# Altium PCB hdmi addon.PcbDoc
Units mil, origin at the board's own origin, x right, y up, seen from the top; angles counter-clockwise.
Board outline 3395.53 x 2214.53 mil, 2 copper layers (Top Layer, Bottom Layer); 10 components, 18 nets, 59 pads, 9 vias.
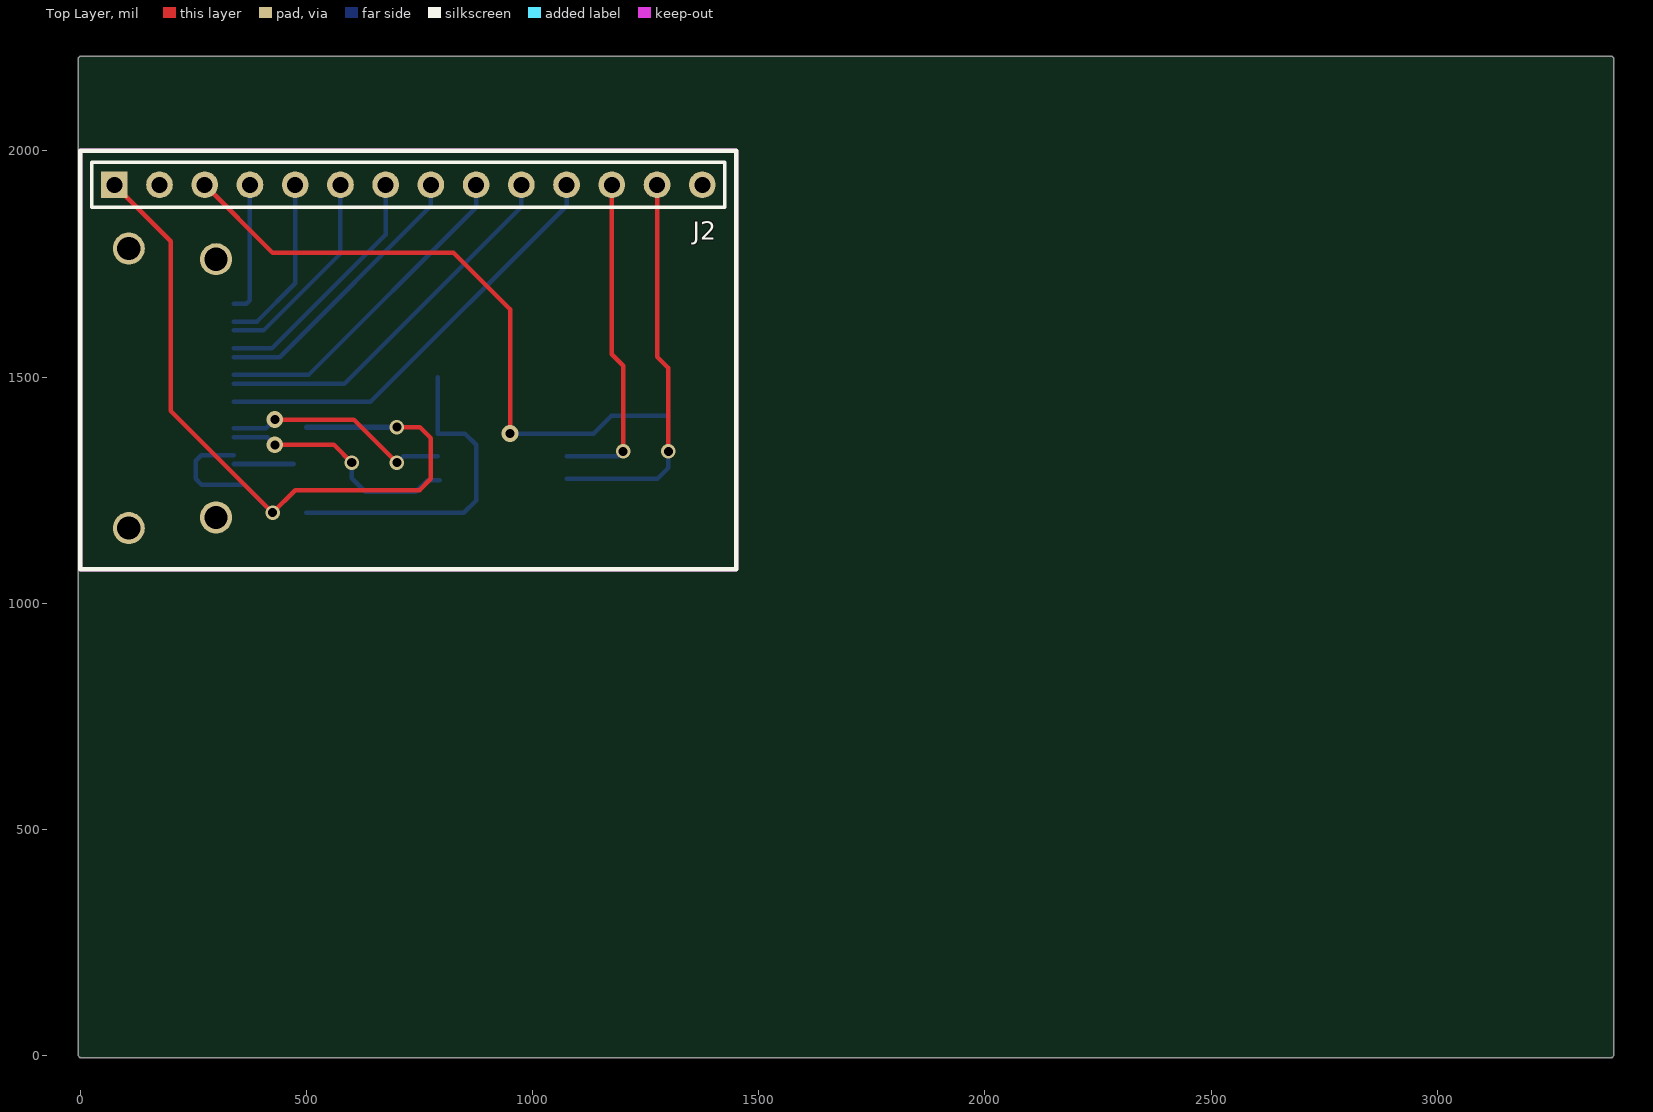
[diagram p0: Top Layer view]
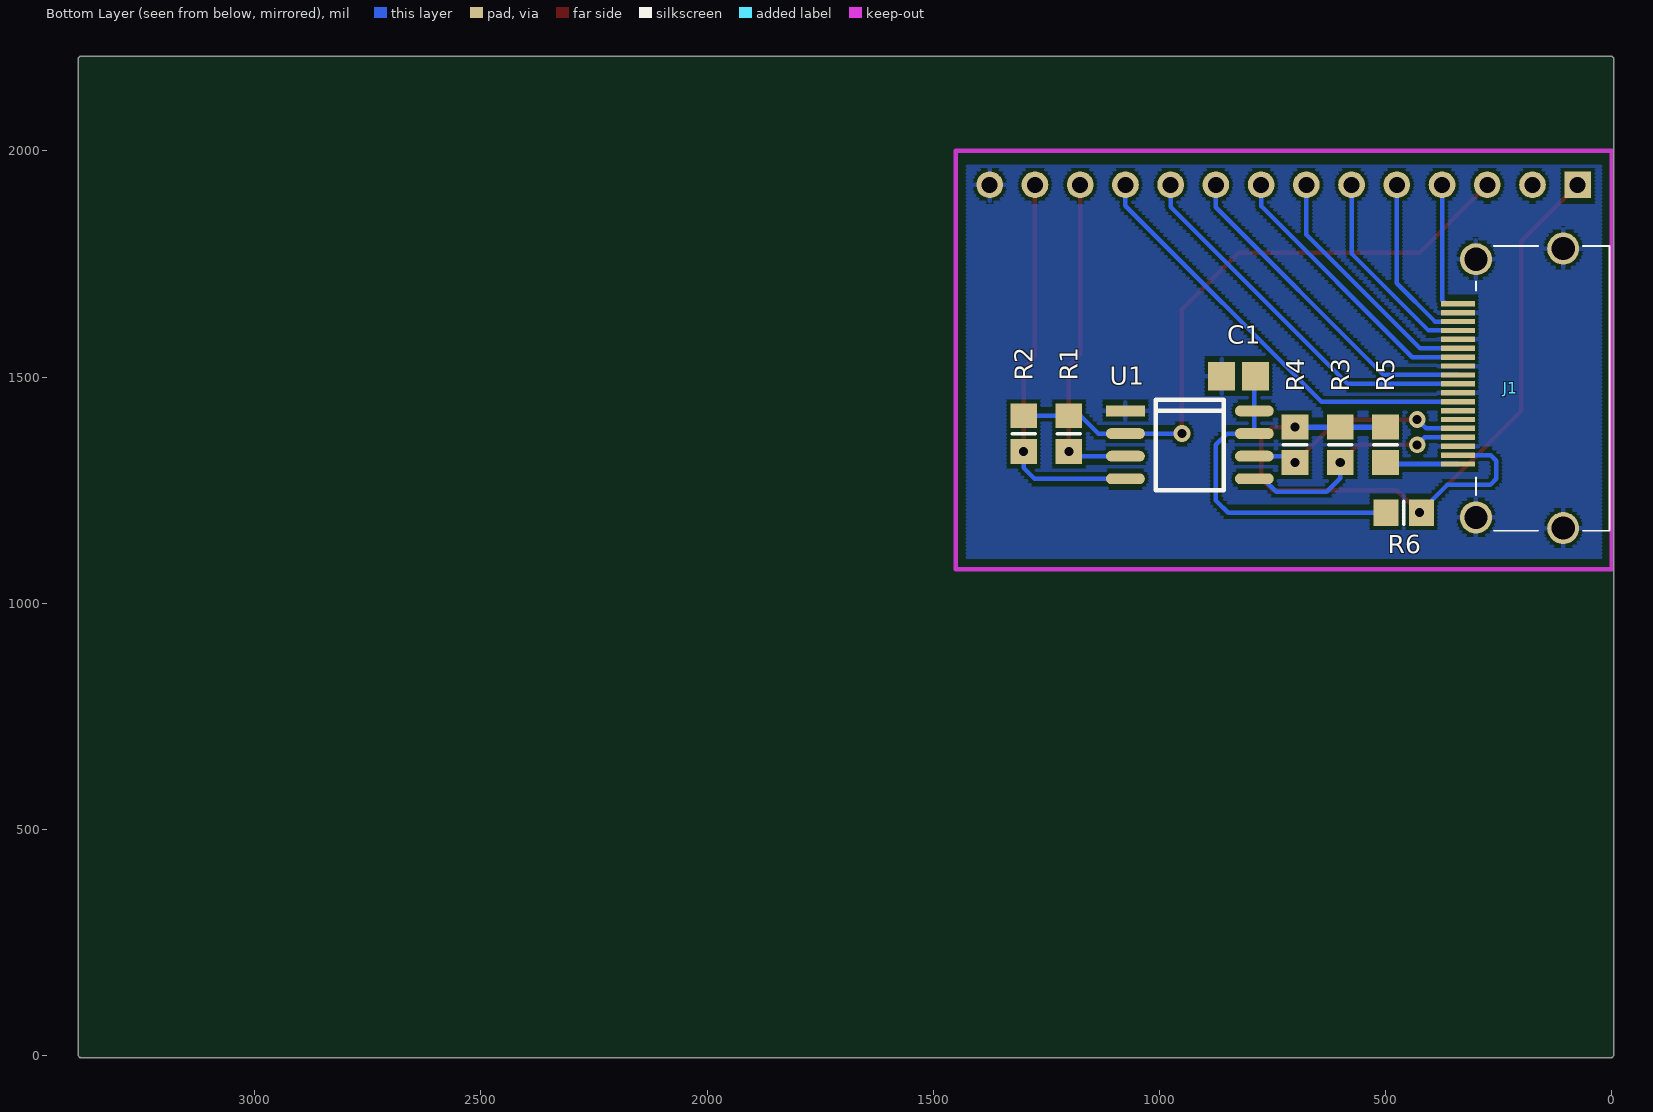
[diagram p1: Bottom Layer view, seen from below]

## Layer stack, top to bottom
Top Layer: signal copper 1.4
Dielectric: core 12.6, FR-4, Dk 4.8
Bottom Layer: signal copper 1.4

## Board outline
-5,0 0,-5 3385.53,-5 3390.53,0 3390.53,2204.53 3385.53,2209.53 0,2209.53 -5,2204.53

## Design rules (kind name [scope] priority, off if disabled: settings)
Clearance [All] p1: gap=7
HoleSize [All] p1: absolutevalues=TRUE maxlimit=200 minlimit=1 maxpercent=80.000 minpercent=20.000
MinimumSolderMaskSliver [All] p1: minsoldermaskwidth=8
PlaneConnect [All] p1: planeconnectstyle=Relief reliefexpansion=25 reliefentries=4 reliefconductorwidth=12 reliefairgap=10
PolygonConnect [All] p1: connectstyle=Relief reliefconductorwidth=10 reliefentries=4 polygonreliefangle="90 Angle"
RoutingLayers RoutingLayers_1 [All] p1: top layer_v5=TRUE bottom layer_v5=TRUE
RoutingLayers [All] p2: top layer_v5=TRUE bottom layer_v5=TRUE
RoutingVias [All] p1: holewidth=20 width=37 viastyle="Through Hole" minholewidth=16 minwidth=31 maxholewidth=28 maxwidth=50
SilkToSilkClearance [All] p1: silktosilkclearance=5
SilkscreenOverComponentPads [IsPad] p1: minsilkscreentomaskgap=5
SolderMaskExpansion [All] p1: expansion=0
Width Net_Width_1 [InNet('1.2V') Or InNet('2.5V') Or InNet('3.3V') Or InNet('5V')] p1: maxlimit=12 minlimit=8 preferedwidth=10
Width [All] p2: maxlimit=12 minlimit=8 preferedwidth=10
22 further rules are at their usual default settings.

## Components (designator, comment, footprint, x,y, rotation, side; value= is the part's Value field where it differs from the comment)
C1 "Cap" CAPC2012M 825,1502 r180 bottom
J1 "HDMI Connector" "HDMI 10029449" 300,1475 r90 bottom
J2 "Header 14" HDR1X14 75,1925 r0 top
R1 "Res1" RESC2012M 1200,1375 r90 bottom
R2 "Res1" RESC2012M 1300,1375 r90 bottom
R3 "Res1" RESC2012M 600,1350 r90 bottom
R4 "Res1" RESC2012M 700,1350 r90 bottom
R5 "Res1" RESC2012M 500,1350 r270 bottom
R6 "Res1" RESC2012M 460,1200 r180 bottom
U1 "PCA9306" SOJ.050/8/WB.300/L.200 1075,1425 r270 bottom

## Footprints (in the part's own frame and the unit in brackets; to place one, negate y for a bottom-side part, rotate by r counter-clockwise, add the part's x,y. Pads: shape width x height; smd on the part's side, far side on the other; paste and mask are expansions set on the pad)
CAPC2012M [mm] "Chip Capacitor, Body 2.0x1.3mm, IPC Low Density"
  rect 1.5x1.6 smd: 1(-0.95,0) 2(0.95,0)
  body extent -1.1,-0.72 1.1,0.72, height 1.1
"HDMI 10029449" [mm]
  round 1.8 hole 1.3: 0(-7.85,-4.9) 0(-7.25,0) 0(7.25,0) 0(7.85,-4.9)
  rect 0.3x1.9 smd: 1(4.75,1) 2(4.25,1) 3(3.75,1) 4(3.25,1) 5(2.75,1) 6(2.25,1) 7(1.75,1) 8(1.25,1) 9(0.75,1) 10(0.25,1) 11(-0.25,1) 12(-0.75,1) 13(-1.25,1) 14(-1.75,1) 15(-2.25,1) 16(-2.75,1) 17(-3.25,1) 18(-3.75,1) 19(-4.25,1)
  silkscreen extent -8,-7.5 8,0
HDR1X14 [mm] "Connector; Header; 14 Position"
  rect 1.5x1.5 hole 0.9: 1(0,0)
  round 1.5 hole 0.9: 2(2.54,0) 3(5.08,0) 4(7.62,0) 5(10.16,0) 6(12.7,0) 7(15.24,0) 8(17.78,0) 9(20.32,0) 10(22.86,0) 11(25.4,0) 12(27.94,0) 13(30.48,0) 14(33.02,0)
  silkscreen extent -1.27,-1.27 34.29,1.27
RESC2012M [mm] "Chip Resistor, Body 2.0x1.3mm, IPC Low Density"
  rect 1.4x1.5 smd: 1(-1,0) 2(1,0)
  silkscreen extent 0,-0.65 0,0.65, body extent -1.07,-0.7 1.07,0.7, height 0.65
SOJ.050/8/WB.300/L.200 [mil]
  rect 24x86 smd: 1(0,0)
  oval 24x86 smd: 2(50,0) 3(100,0) 4(150,0) 5(150,285) 6(100,285) 7(50,285) 8(0,285)
  silkscreen extent -25,67 175,218

## Part data
C1: "Capacitor"
J1: library part D-300-0056, "HDMI, SMD, R/A KDMIX-NS1-WS-B"
J2: "Header, 14-Pin"
R1 R2 R3 R4 R5 R6: "Resistor"

## Via types
v1: diameter 32, hole 20, Top Layer to Bottom Layer, 6 vias
v2: diameter 37, hole 20, Top Layer to Bottom Layer, 3 vias

## Nets (pads, with @x,y where several pads share a name; then routed paths per layer and width w, separated by ;. In a path a pad name is that pad's centre, name@x,y a point inside that pad or via, vN(x,y) a via of type N, cw(c..) or ccw(c..) an arc to the next point about the centre after c; other vN are vias at no path point)
3.3V: J2.3 R1.2 R2.2 U1.2 | length 1430.2
  Top Layer w10: J2.3 425,1775 825,1775 950,1650 v2(950,1375)
  Bottom Layer w10: v2(950,1375) U1.2 1134.91,1375 1174.28,1414.37 R1.2 R2.2
5V: J1.18 J2.1 R3.2 R4.2 R5.1 R6.2 | length 1956.7
  Top Layer w10: J2.1 200,1800 200,1425 v1(425,1200) 475,1250 750,1250 775,1275 775,1365 750.63,1389.37 v1(700,1389.37)
  Bottom Layer w10: J1.18 267.36,1327.36 255,1315 255,1275 268,1262 363,1262 v1(425,1200)
  Bottom Layer w12: R5.1 R3.2 v1(700,1389.37)
EXT1(WP): J2.2
EXT7: J1.1 J2.4 | length 293.9
  Bottom Layer w10: J1.1 367.01,1662.01 375,1670 J2.4
EXT10: J1.3 J2.5 | length 388.5
  Bottom Layer w10: J1.3 390.55,1622.64 475,1707.09 J2.5
EXT13: J1.4 J2.6 | length 489.6
  Bottom Layer w10: J1.4@370.87,1602.95 J1.4 404.95,1602.95 575,1773 J2.6
EXT16: J1.6 J2.7 | length 549.8
  Bottom Layer w10: J1.6 423.58,1563.58 675,1815 J2.7
EXT19: J1.7 J2.8 | length 621
  Bottom Layer w10: J1.7 440.9,1543.9 775,1878 J2.8
EXT22: J1.9 J2.9 | length 739.1
  Bottom Layer w10: J1.9 504.53,1504.53 875,1875 J2.9
EXT25: J1.10 J2.10 | length 846.7
  Bottom Layer w10: J1.10 583.84,1484.84 975,1876 J2.10
EXT28: J1.12 J2.11 | length 961.2
  Bottom Layer w10: J1.12 641.47,1445.47 1075,1879 J2.11
EXT31: J2.12 R1.1 U1.3 | length 729.1
  Top Layer w10: J2.12 1175,1550 1200,1525 v1(1200,1335.63)
  Bottom Layer w10: U1.3 1189.37,1325 v1(1200,1335.63)
EXT34: J2.13 R2.1 U1.4 | length 876.3
  Top Layer w10: J2.13 1275,1545 1300,1520 v1(1300,1335.63)
  Bottom Layer w10: U1.4 1276,1275 1300,1299 v1(1300,1335.63) R2.1@1305,1335.63
GND: C1.1 J1.0 J1.2 J1.5 J1.8 J1.11 J1.17 J2.14 U1.1
NetC1_2: C1.2 R6.1 U1.7 U1.8 | length 729.8
  Bottom Layer w10: R6.1 848,1200 875,1227 875,1350 850,1375 U1.7 U1.8 C1.2@790,1499.6
NetJ1_15: J1.15 R4.1 U1.6 | length 504.2
  Top Layer w10: v2(430,1406) 604.63,1406 v1(700,1310.63)
  Bottom Layer w10: J1.15 410.42,1386.42 v2(430,1406) ; v1(700,1310.63) 714.37,1325 U1.6
NetJ1_16: J1.16 R3.1 U1.5 | length 536.7
  Top Layer w10: v2(430,1350) 560.63,1350 v1(600,1310.63)
  Bottom Layer w10: J1.16 413.27,1366.73 v2(430,1350) ; v1(600,1310.63) 600,1276 630,1246 741.68,1246 767.68,1272 U1.5@795,1272
NetJ1_19: J1.19 R5.2 | length 132.7
  Bottom Layer w10: J1.19 R5.2@472.05,1307.68
pads on no net: J1.13 J1.14

## Polygon pours and split planes (outlines as drawn)
GND on Bottom Layer "543" (hatched Horizontal grid 8 track 8, pour order 0): 1424.47,1097.93 24.47,1097.93 24.47,1972.93 1424.47,1972.93

## Keep-outs
Keep-Out Layer:
  lines w10: 0,1075 1450,1075 1450,2000 0,2000 0,1075

## Silkscreen, mask and mechanical layers (free items; w line width, h text height)
Top Overlay:
  lines w10: 0,1075 1450,1075 1450,2000 0,2000 0,1075
Mechanical 1:
  lines w10: 0,1075 0,2000 1450,2000 1450,1075 0,1075